# Altium PCB LPF-8-Order.PcbDoc
Units mm, origin at the board's own origin, x right, y up, seen from the top; angles counter-clockwise.
Board outline 57 x 51 mm, 2 copper layers (Top Layer, Bottom Layer); 27 components, 15 nets, 68 pads, 0 vias.
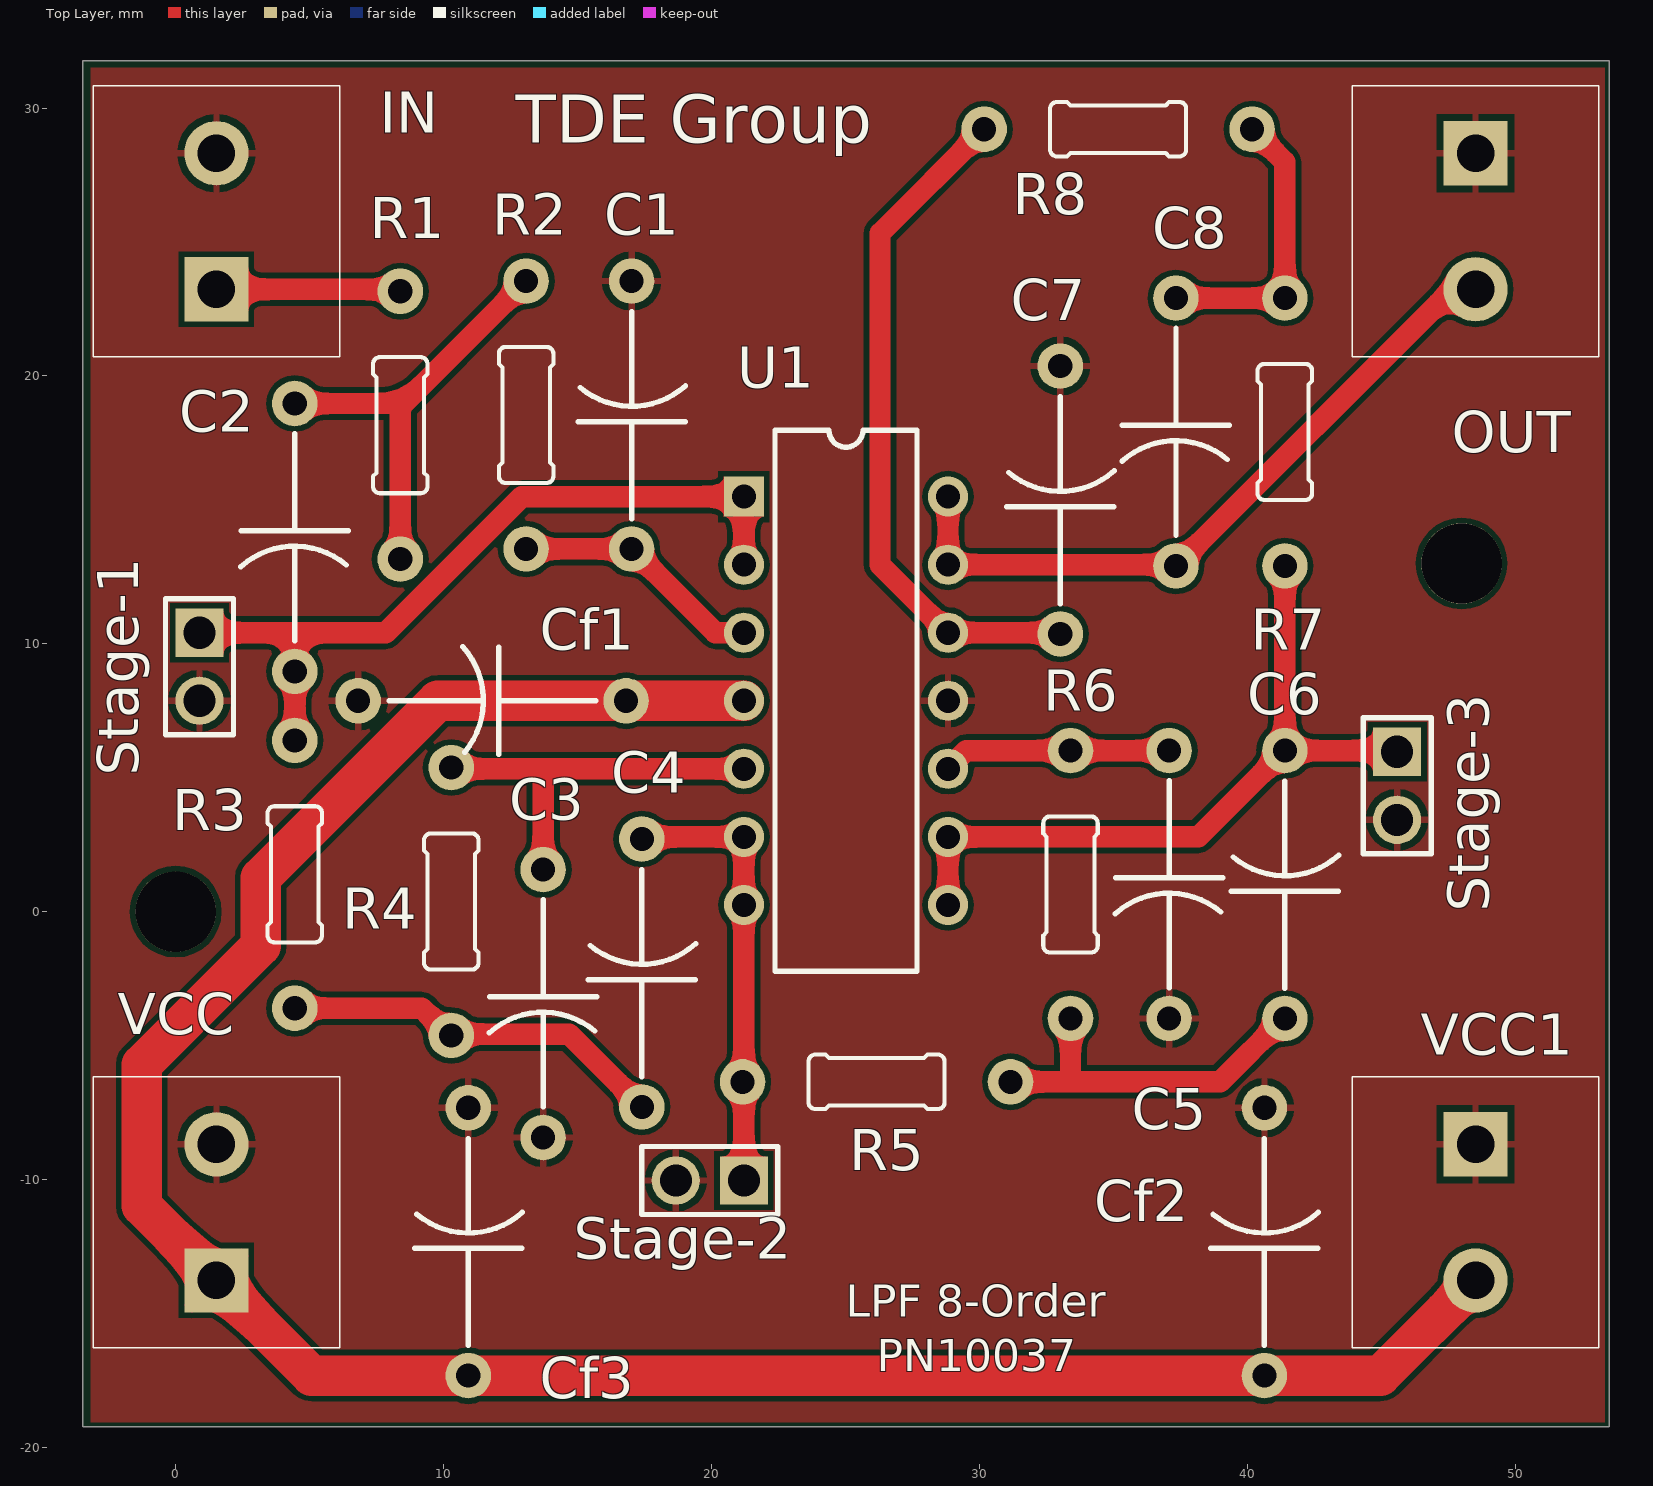
[diagram p0: Top Layer view]
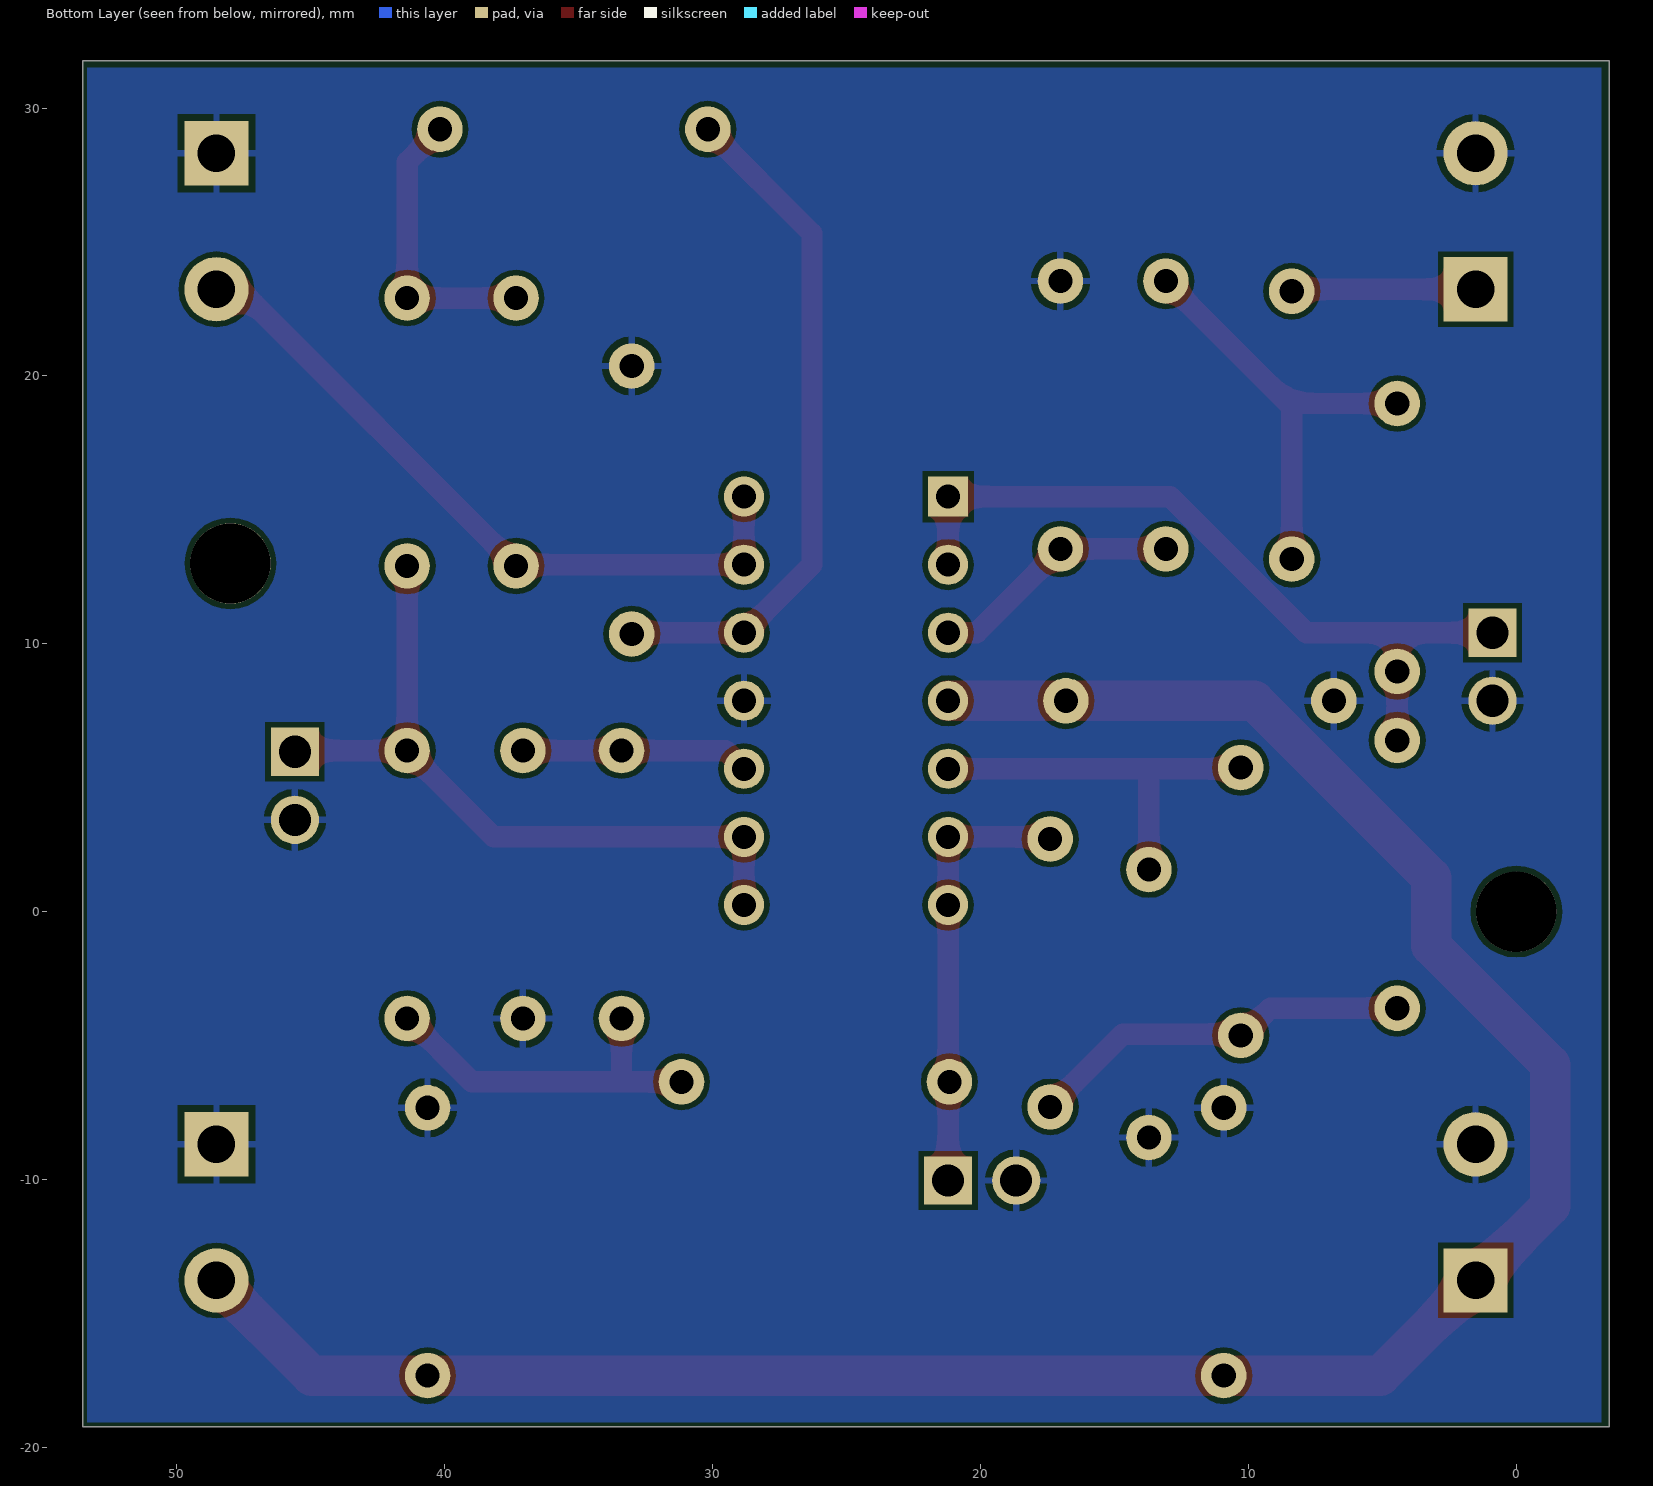
[diagram p1: Bottom Layer view, seen from below]

## Layer stack, top to bottom
Top Solder: solder mask 0.0102, Solder Resist, Dk 3.5
Top Layer: signal copper 0.0356
Dielectric 1: dielectric 0.32, FR-4, Dk 4.8
Bottom Layer: signal copper 0.0356
Bottom Solder: solder mask 0.0102, Solder Resist, Dk 3.5

## Board outline
-3.479,-19.226 -3.479,31.774 53.521,31.774 53.521,-19.226

## Design rules (kind name [scope] priority, off if disabled: settings)
Clearance [All] p1: gap=0.2
HoleSize [All] p1: absolutevalues=TRUE maxlimit=5 minlimit=0.025 maxpercent=80.000 minpercent=20.000
PolygonConnect [All] p1: connectstyle=Relief reliefconductorwidth=0.254 reliefentries=4 polygonreliefangle="90 Angle" airgapwidth=0.254
RoomDefinition LPF-8-Order [InComponentClass('LPF-8-Order')] p1: confinementstyle=ConfineIn formatcopy=TRUE lockcomponents=FALSE outline -6.985,-24.13 61.214,-24.13 61.214,34.163 -6.985,34.163
RoutingVias [All] p1: holewidth=0.711 width=1.27 viastyle="Through Hole" minholewidth=0.711 minwidth=1.27 maxholewidth=0.711 maxwidth=1.27
SilkToSolderMaskClearance [IsPad] p1: minsilkscreentomaskgap=0.1 clearancetoexposedcopper=TRUE
SolderMaskExpansion [All] p1: expansion=0.102
Width [All] p1: maxlimit=5 minlimit=0.254 preferedwidth=0.8
28 further rules are at their usual default settings.

## Components (designator, comment, footprint, x,y, rotation, side; value= is the part's Value field where it differs from the comment)
C1 "Capacitor-Dummy-THT" Dummy-10mm 17.018,18.542 r90 top
C2 "Capacitor-Dummy-THT" Dummy-10mm 4.445,13.97 r270 top
C3 "Capacitor-Dummy-THT" Dummy-10mm 13.716,-3.429 r270 top
C4 "Capacitor-Dummy-THT" Dummy-10mm 17.399,-2.286 r90 top
C5 "Capacitor-Dummy-THT" Dummy-10mm 37.084,1.016 r270 top
C6 "Capacitor-Dummy-THT" Dummy-10mm 41.402,1.016 r90 top
C7 "Capacitor-Dummy-THT" Dummy-10mm 33.02,15.367 r90 top
C8 "Capacitor-Dummy-THT" Dummy-10mm 37.338,17.907 r270 top
Cf1 "Capacitor-Dummy-THT" Dummy-10mm 11.811,7.874 r180 top
Cf2 "Capacitor-Dummy-THT" Dummy-10mm 40.64,-12.319 r90 top
Cf3 "Capacitor-Dummy-THT" Dummy-10mm 10.922,-12.319 r90 top
IN "PHOENIX_1715721" Phoenix-2-5_08 1.521,25.774 r90 top
OUT "PHOENIX_1715721" Phoenix-2-5_08 48.521,25.774 r270 top
R1 "Resistor-Dummy-THT" Dummy-10mm 8.382,18.161 r270 top
R2 "Resistor-Dummy-THT" Dummy-10mm 13.081,18.542 r270 top
R3 "Resistor-Dummy-THT" Dummy-10mm 4.445,1.397 r270 top
R4 "Resistor-Dummy-THT" Dummy-10mm 10.287,0.381 r90 top
R5 "Resistor-Dummy-THT" Dummy-10mm 26.162,-6.35 r0 top
R6 "Resistor-Dummy-THT" Dummy-10mm 33.401,1.016 r90 top
R7 "Resistor-Dummy-THT" Dummy-10mm 41.402,17.907 r90 top
R8 "Resistor-Dummy-THT" Dummy-10mm 35.179,29.21 r180 top
Stage-1 "Plug_2_90_2.54" HDR1X2 0.889,9.144 r270 top
Stage-2 "Plug_2_90_2.54" HDR1X2 19.939,-10.033 r180 top
Stage-3 "Plug_2_90_2.54" HDR1X2 45.593,4.699 r270 top
U1 "TLC2274IN" DIP-14 25.019,7.874 r270 top
VCC "PHOENIX_1715721" Phoenix-2-5_08 1.521,-11.226 r90 top
VCC1 "PHOENIX_1715721" Phoenix-2-5_08 48.521,-11.226 r270 top

## Footprints (in the part's own frame and the unit in brackets; to place one, negate y for a bottom-side part, rotate by r counter-clockwise, add the part's x,y. Pads: shape width x height; smd on the part's side, far side on the other; paste and mask are expansions set on the pad)
DIP-14 [mm] "DIP; 14 Leads; Row Spacing 7.62 mm; Pitch 2.54 mm"
  rect 1.5x1.5 hole 0.9: 1(-7.62,-3.81)
  round 1.5 hole 0.9: 2(-5.08,-3.81) 3(-2.54,-3.81) 4(0,-3.81) 5(2.54,-3.81) 6(5.08,-3.81) 7(7.62,-3.81) 8(7.62,3.81) 9(5.08,3.81) 10(2.54,3.81) 11(0,3.81) 12(-2.54,3.81) 13(-5.08,3.81) 14(-7.62,3.81)
  silkscreen extent -10.1,-2.65 10.1,2.65, body extent -10.02,-2.6 10.09,2.7, height 3
Dummy-10mm [mm] "Dummy-10mm"
  round 1.7 hole 0.9: 1(-5,0) 2(5,0)
  silkscreen extent -3.88,-2.01 3.85,2, body extent -2.39,-0.88 2.41,0.88, height 1.87
HDR1X2 [mm] "Connector; Header; 2 Position"
  rect 1.8x1.8 hole 1.2: 1(-1.27,0)
  round 1.8 hole 1.2: 2(1.27,0)
  silkscreen extent -2.54,-1.27 2.54,1.27, body extent -2.54,-1.27 2.54,1.27, height 8.62
Phoenix-2-5_08 [mm] "Phoenix, 1715721"
  rect 2.4x2.4 hole 1.4: 1(-2.54,0)
  round 2.4 hole 1.4: 2(2.54,0)
  silkscreen extent -5.06,-4.6 5.06,4.6, body extent -5.05,-5.19 5.85,4.61, height 14.2

## Part data
IN OUT VCC VCC1: library part 2Pol_1715721, "Phoenix, 2 pol, 5.08mm, 22A, 715721"
Stage-1 Stage-2 Stage-3: "Plug, 2-Pin"
U1: "Reel to Reel  quad OP"

## Free pads (board coordinates)
  round 3 hole 3 unplated: NDK(0,0) NDK(48,13)

## Nets (pads, with @x,y where several pads share a name; then routed paths per layer and width w, separated by ;. In a path a pad name is that pad's centre, name@x,y a point inside that pad or via, vN(x,y) a via of type N, cw(c..) or ccw(c..) an arc to the next point about the centre after c; other vN are vias at no path point)
GND: C1.2 C3.2 C5.2 C7.2 Cf1.2 Cf2.2 Cf3.2 IN.2 OUT.1 Stage-1.2 Stage-2.2 Stage-3.2 U1.11 VCC1.1 VCC.2
NetC1_1: C1.1 R2.2 U1.3 | length 9.4
  Top Layer w0.8: R2.2 C1.1 20.146,10.414 U1.3
NetC2_1: C2.1 R1.2 R2.1 | length 16.4
  Top Layer w0.8: C2.1 8.509,18.97 ; R1.2 8.382,18.843 8.509,18.97 ; R2.1 8.509,18.97
NetC2_2: C2.2 R3.1 Stage-1.1 U1.1 U1.2 | length 29
  Top Layer w0.8: Stage-1.1 4.445,10.414 ; R3.1 C2.2 4.445,10.414 ; U1.2 U1.1 12.922,15.494 7.842,10.414 4.445,10.414
NetC3_1: C3.1 R4.2 U1.5 | length 14.7
  Top Layer w0.8: R4.2@10.287,5.334 13.843,5.334 ; C3.1 13.716,5.207 13.843,5.334 ; U1.5 13.843,5.334
NetC4_1: C4.1 R3.2 R4.1 | length 14.5
  Top Layer w0.8: R3.2 9.191,-3.603 10.16,-4.572 14.685,-4.572 C4.1
NetC4_2: C4.2 R5.1 Stage-2.1 U1.6 U1.7 | length 16.7
  Top Layer w0.8: C4.2@17.479,2.794 U1.6 U1.7 21.209,-9.652 Stage-2.1@20.828,-10.033
NetC5_1: C5.1 R6.2 U1.10 | length 8.5
  Top Layer w0.8: U1.10 29.511,6.016 R6.2 C5.1
NetC6_1: C6.1 R5.2 R6.1 | length 14
  Top Layer w0.8: R5.2@30.781,-6.35 33.274,-6.35 ; R6.1 33.401,-6.223 33.274,-6.35 ; C6.1 41.355,-3.984 38.989,-6.35 33.274,-6.35
NetC6_2: C6.2 R7.1 Stage-3.1 U1.8 U1.9 | length 27.5
  Top Layer w0.8: U1.8 U1.9 38.18,2.794 C6.2 ; R7.1 C6.2 ; Stage-3.1 45.546,6.016 C6.2
NetC7_1: C7.1 R8.2 U1.12 | length 25.7
  Top Layer w0.8: R8.2 26.289,25.32 26.289,12.954 U1.12 32.973,10.414 C7.1
NetC8_1: C8.1 R7.2 R8.1 | length 10.9
  Top Layer w0.8: C8.1 R7.2 41.402,27.987 R8.1
NetC8_2: C8.2 OUT.2 U1.13 U1.14 | length 26.5
  Top Layer w0.8: U1.14 U1.13 37.291,12.954 C8.2 47.665,23.234 OUT.2
NetIN_1: IN.1 R1.1 | length 6.9
  Top Layer w0.8: IN.1 R1.1@8.382,23.234
VCC: Cf1.1 Cf2.1 Cf3.1 U1.4 VCC1.2 VCC.1 | length 88.7
  Top Layer w1.5: U1.4 Cf1.1 9.779,7.874 3.175,1.27 3.175,-1.27 -1.27,-5.715 -1.27,-10.975 5.074,-17.319 Cf3.1 44.968,-17.319 VCC1.2

## Polygon pours and split planes (outlines as drawn)
GND on Bottom Layer "GND" (solid, pour order 0): -3.175,-19.05 53.34,-19.05 53.34,31.496 -3.175,31.496
GND on Top Layer "GND" (solid, pour order 2): -3.175,-19.05 -3.175,31.496 53.34,31.496 53.34,-19.05

## Silkscreen, mask and mechanical layers (free items; w line width, h text height)
Top Overlay:
  text "TDE Group" at 12.7,28.702 h1.8
  text "LPF 8-Order" at 25.019,-15.113 h1.2
  text "PN10037" at 26.162,-17.145 h1.2
Outline:
  the board outline again, w0.1

## Dimensions
-3.479,-19.226 to 53.521,-19.226 on Mechanical 16
53.521,-19.226 to 53.521,31.774 on Mechanical 16